# Altium PCB HiFive1.B01.PcbDoc (part 1 of 2)
Units mil, origin at the board's own origin, x right, y up, seen from the top; angles counter-clockwise.
Board outline 2700 x 2100 mil, 2 copper layers (Top Layer, Bottom Layer), stack 61 mil thick; 112 components, 78 nets, 451 pads, 247 vias.
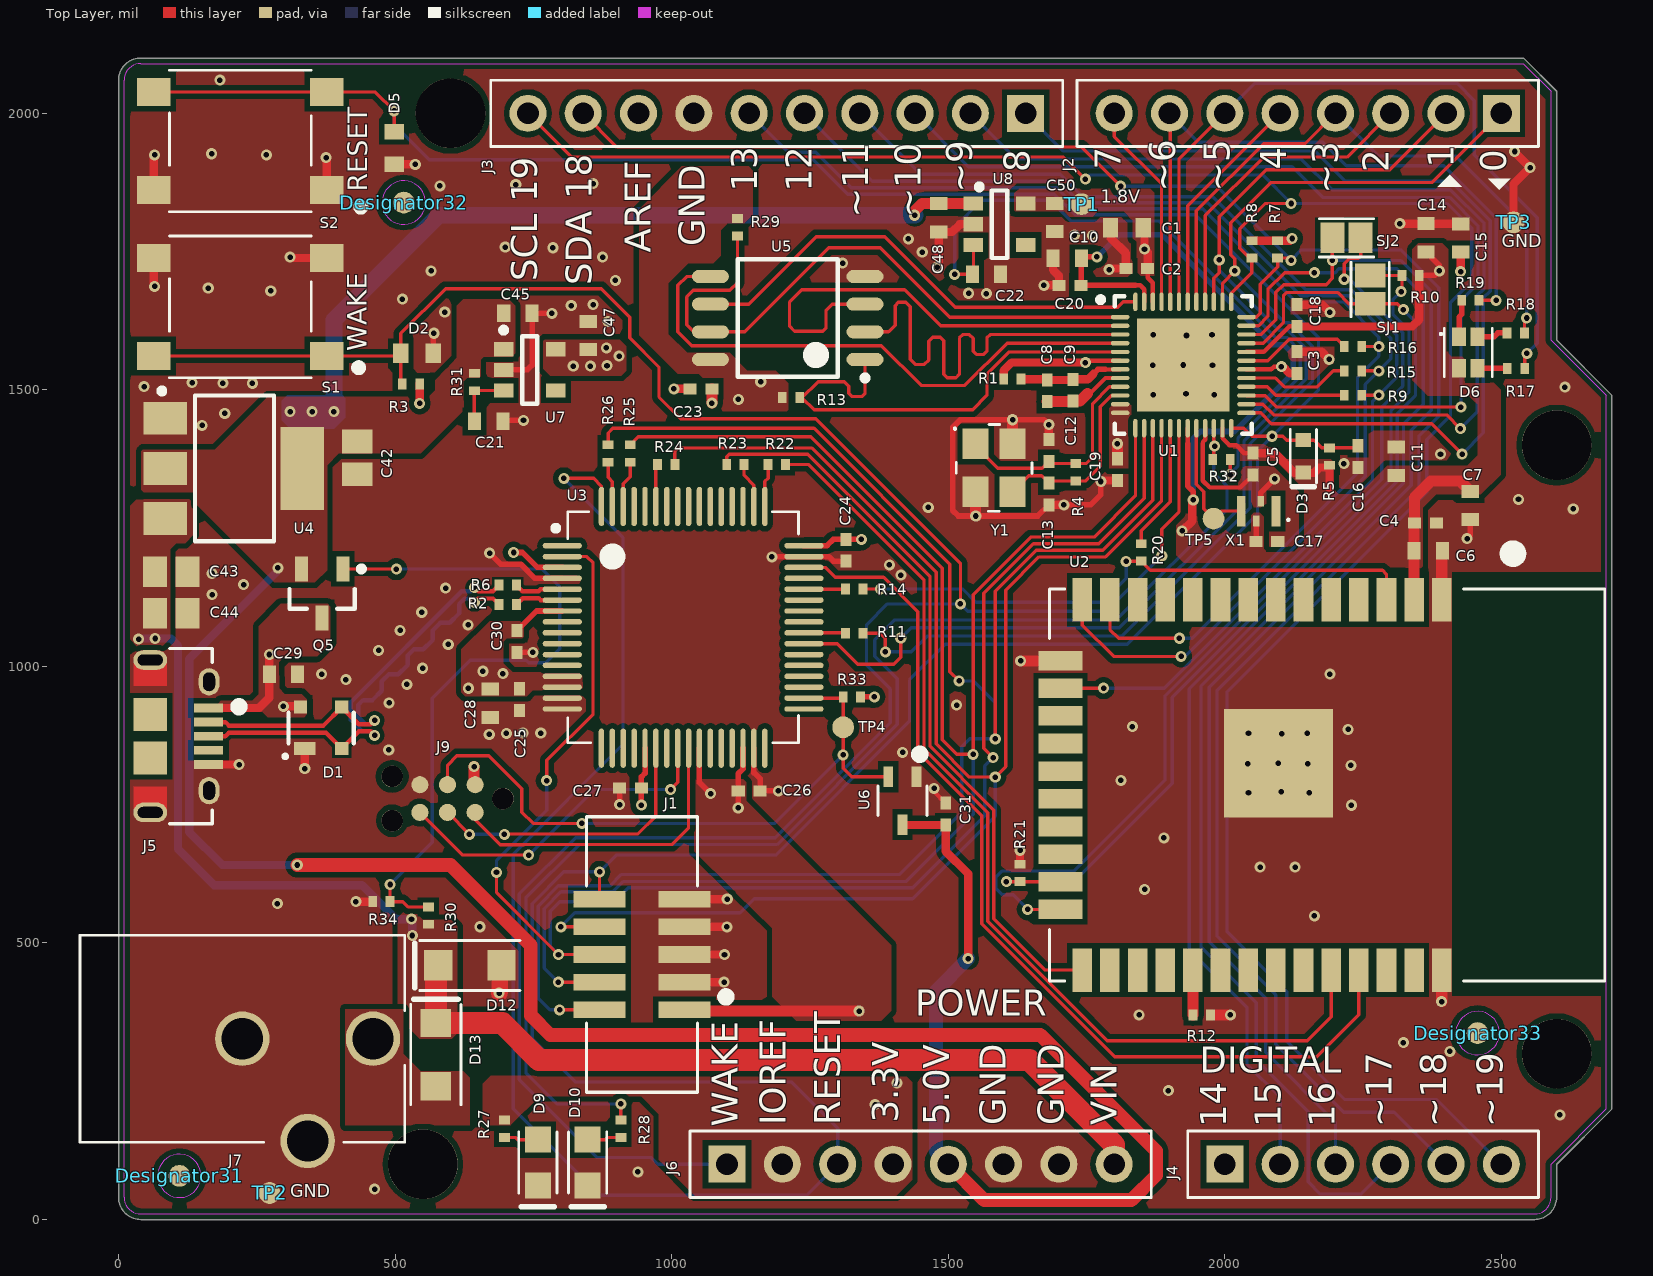
[diagram p0: Top Layer view]
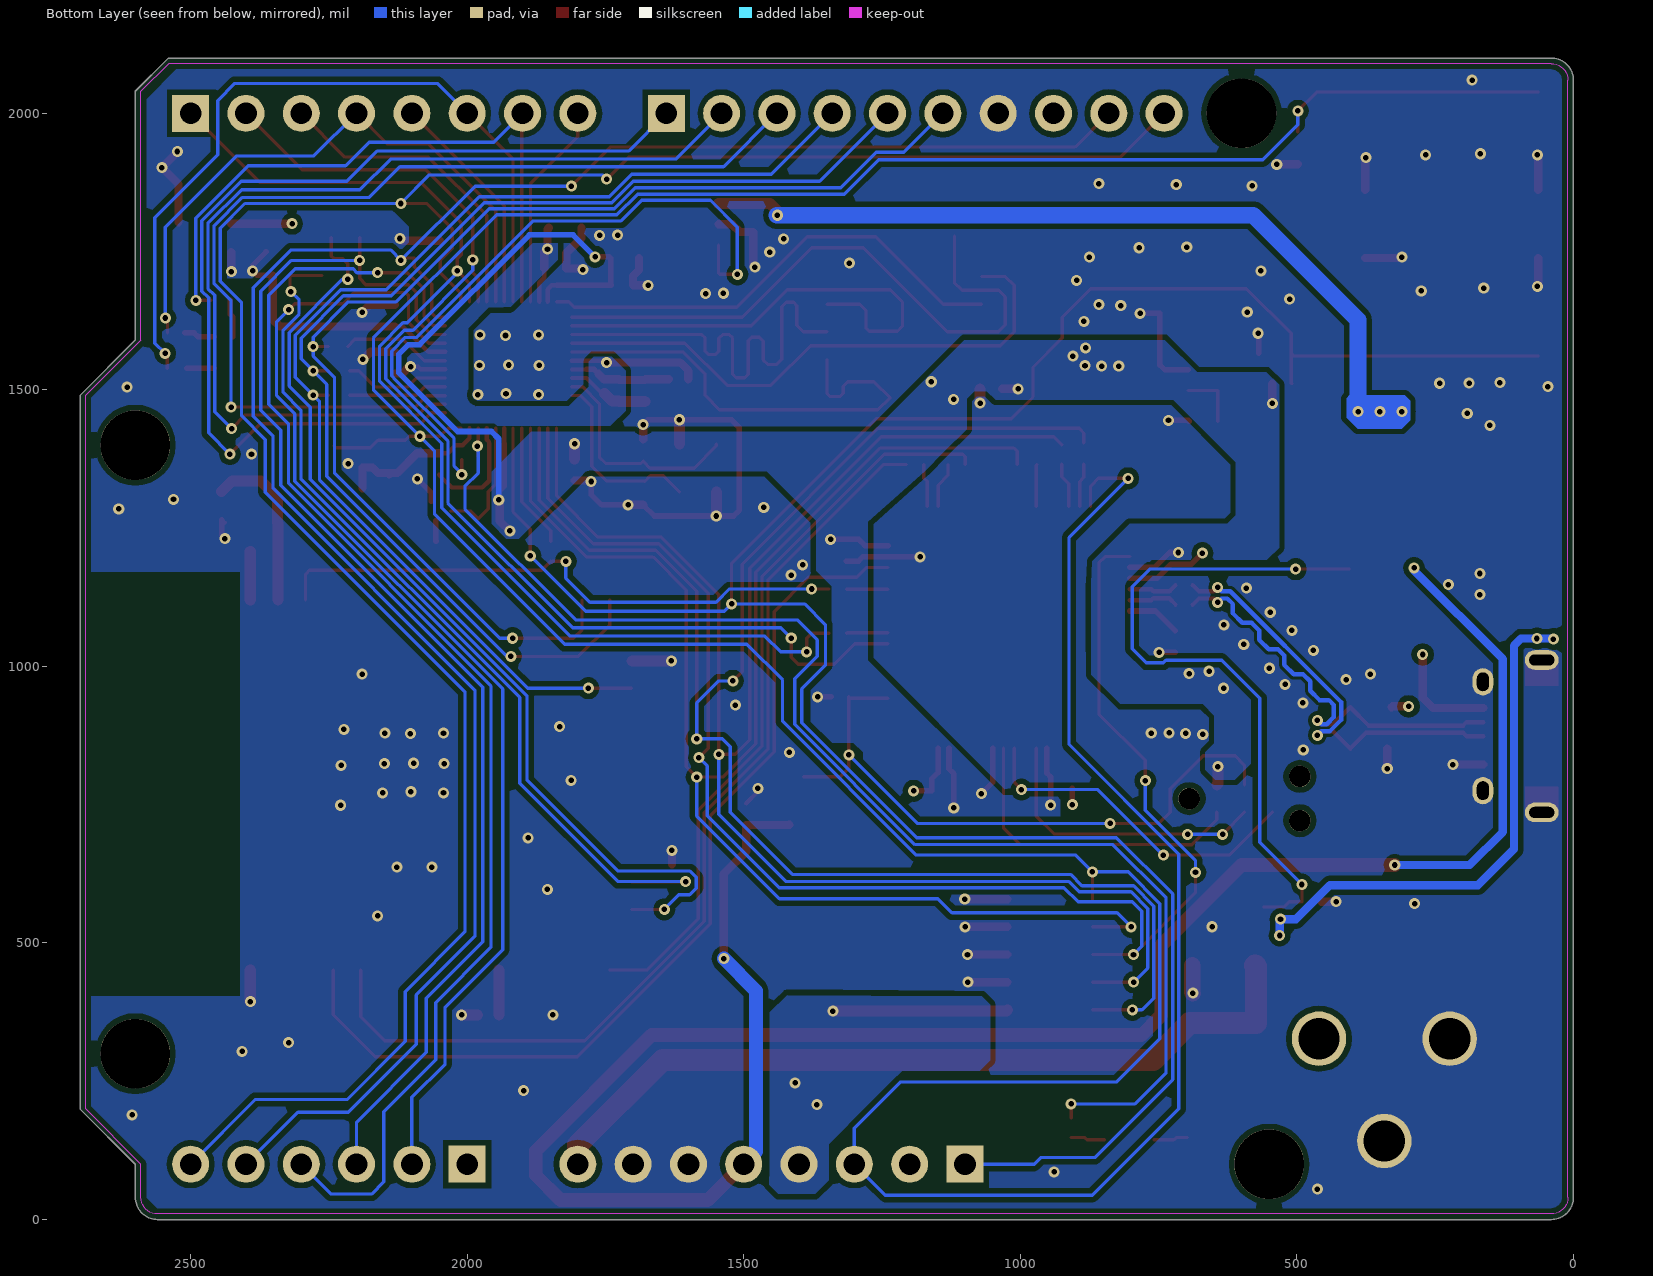
[diagram p1: Bottom Layer view, seen from below]

## Layer stack, top to bottom
Top Solder: solder mask 0.5, Solder Resist, Dk 3.5
Top Layer: signal copper 1.4
Dielectric 1: core 58.2, FR-4, Dk 4
Bottom Layer: signal copper 1.4
Bottom Solder: solder mask 0.5, Solder Resist, Dk 3.5

## Board outline
0,40 0,2060 cw(c40,2060) 40,2100 2540,2100 2600,2040 2600,1590 2700,1490 2700,200 2600,100 2600,40 cw(c2560,40) 2560,0 40,0 cw(c40,40)

## Design rules (kind name [scope] priority, off if disabled: settings)
Clearance 90ohm [InNetClass('DIFF90') vs IsRegion] p1: gap=6 ignorepadtopadclearanceinfootprint=FALSE except(5: Track-Track SMDPad-SMDPad SMDPad-Poly SMDPad-Region Region-Region; 7: Via-Poly; 8: Arc-Hole Track-Hole SMDPad-Hole THPad-Hole Via-Hole Fill-Hole Poly-Hole Region-Hole Text-Hole; 10: Arc-Poly THPad-Poly Fill-Poly; 12: Poly-Poly)
Clearance PolygonClearance [InPolygon] p2: gap=10 ignorepadtopadclearanceinfootprint=FALSE except(8: Arc-Hole Track-Hole SMDPad-Hole THPad-Hole Via-Hole Fill-Hole Poly-Hole Region-Hole Text-Hole)
Clearance [All] p3: gap=6 ignorepadtopadclearanceinfootprint=FALSE except(5: Track-Track SMDPad-SMDPad SMDPad-Poly SMDPad-Region Region-Region; 8: Arc-Hole Track-Hole SMDPad-Hole THPad-Hole Via-Hole Fill-Hole Poly-Hole Region-Hole Text-Hole; 10: Arc-Poly THPad-Poly Via-Poly Fill-Poly; 12: Track-Poly Poly-Poly)
ComponentClearance [All] p1: gap=3 collisioncheckmode=3 verticalgap=3 showdistances=FALSE
DiffPairsRouting DIFF90DiffPairsRouting [InNetClass('DIFF90')] p1: maxlimit=5 minlimit=5 mostfreqgap=5 toplayer_minwidth=8 toplayer_maxwidth=8 toplayer_prefwidth=8 bottomlayer_minwidth=8 bottomlayer_maxwidth=8 bottomlayer_prefwidth=8 maxuncoupledlength=500
HoleSize [All] p1: absolutevalues=TRUE maxlimit=150 minlimit=1 maxpercent=80.000 minpercent=20.000
MatchedLengths QSPIMatchedLengths [InNetClass('QSPI')] p1: tolerance=200 checknetsindiffpair=FALSE checkdiffpairvsdiffpair=TRUE checkxsignals=TRUE checkothers=TRUE
MatchedLengths Diff90MatchedLengths [InxSignalClass('USB')] p2: tolerance=10 checknetsindiffpair=TRUE checkdiffpairvsdiffpair=FALSE checkxsignals=FALSE checkothers=FALSE
MinimumSolderMaskSliver [All] p1: minsoldermaskwidth=0
PlaneClearance [All] p1: clearance=10
PlaneConnect [All] p1: planeconnectstyle=Direct reliefexpansion=20 reliefentries=4 reliefconductorwidth=10 reliefairgap=10
PolygonConnect [All] p1: connectstyle=Direct reliefconductorwidth=10 reliefentries=4 polygonreliefangle="90 Angle" airgapwidth=10
RoutingVias [All] p1: holewidth=10 width=20 viastyle="Through Hole" minholewidth=10 minwidth=20 maxholewidth=28 maxwidth=50
SilkToSilkClearance [All] p1: silktosilkclearance=0
SilkToSolderMaskClearance [IsPad] p1: minsilkscreentomaskgap=0 clearancetoexposedcopper=TRUE
SolderMaskExpansion [All] p1: expansion=4
Width PWR [InNetClass('PWR')] p1: maxlimit=40 minlimit=8 preferedwidth=20 minimp=50.000000 maximp=50.000000 favimp=50.000000
Width AntennaImpedanceMatch [(InNet('ANT_OUT1') OR InNet('ANT_OUT2') OR InNet('LNA_IN'))] p2: maxlimit=6.32 minlimit=5.42 preferedwidth=6.08 impedancedriven=TRUE minimp=49.000000 maximp=53.000000 favimp=50.000000
Width [All] p3: maxlimit=40 minlimit=6 preferedwidth=6
22 further rules are at their usual default settings.

## Classes and differential pairs
component class Freedom_E310: C1 C2 C3 C5 C7 C8 C9 C10 C11 C12 C13 C14 C15 C16 C17 C18 C19 C20 C23 D2 D3 D5 D6 J1 J2 J3 J4 J6 R1 R3 R4 R5 R7 R8 R9 R10 R13 R15 R16 R17 R18 R19 R29 S1 S2 SJ1 SJ2 TP5 U1 U5 X1 Y1
component class Debug: C24 C25 C26 C27 C28 C29 C30 C31 D1 J5 J9 R2 R6 R11 R14 R22 R23 R24 R25 R26 R33 TP4 U3 U6
component class Power: C21 C22 C42 C43 C44 C45 C47 C48 C50 D9 D10 D12 D13 J7 Q5 R27 R28 R30 R31 R32 R34 TP1 TP2 TP3 U4 U7 U8
net class DIFF90: USB_D_N USB_D_P USB_D_R_N USB_D_R_P
component class WiFi_BT: C4 C6 R12 R20 R21 U2
net class QSPI: QSPI_CS0 QSPI_DQ0 QSPI_DQ1 QSPI_DQ2 QSPI_DQ3 QSPI_SCK
differential pair USB_D_R: +USB_D_R_P -USB_D_R_N
differential pair USB_D: +USB_D_P -USB_D_N

## Components (designator, comment, footprint, x,y, rotation, side; value= is the part's Value field where it differs from the comment)
C1 "10uF" C0603#1 1823,1793 r180 top
C2 "0.1uF" C0402#1 1840.83,1719.37 r0 top
C3 "0.1uF" C0402#2 2130.83,1549.37 r270 top
C4 "0.1uF" C0402#1 2362.87,1259.1 r180 top
C5 "0.1uF" C0402#1 2051,1366 r90 top
C6 "10uF" C0603#2 2367.87,1209.1 r0 top
C7 "10uF" C0603#2 2444,1291 r270 top
C8 "0.1uF" C0402#3 1678.99,1498.37 r90 top
C9 "0.1uF" C0402#3 1725.83,1499.37 r90 top
C10 "10uF" C0603#2 1715,1738 r180 top
C11 "10uF" C0603#2 2310,1371 r90 top
C12 "15pF" C0402#1 1681.83,1390.53 r90 top
C13 "15pF" C0402#1 1681.83,1311.79 r270 top
C14 "10uF" C0603#2 2363.8,1775 r90 top
C15 "10uF" C0603#2 2426.52,1774.66 r90 top
C16 "10nF" C0402#1 2240.83,1379.37 r270 top
C17 "0.1uF" C0402#1 2076,1226 r180 top
C18 "0.1uF" C0402#1 2130.83,1634.37 r270 top
C19 "0.1uF" C0402#1 1805.83,1355.86 r90 top
C20 "0.1uF" C0402#1 1720,1689 r0 top
C21 "DNP" C0603#2 669,1443 r0 top value=10uF
C22 "10uF" C0603#2 1569.17,1708.88 r0 top
C23 "0.1uF" C0402#1 1052.76,1501.93 r180 top
C24 "0.1uF" C0402#1 1315,1210 r270 top
C25 "0.1uF" C0402#1 725,940 r270 top locked
C26 "0.1uF" C0402#1 1140,775 r0 top
C27 "0.1uF" C0402#1 925.32,780 r180 top
C28 "10uF" C0603#2 671.82,933.34 r90 top
C29 "10uF" C0603#2 298,986 r180 top
C30 "0.1uF" C0402#1 720,1045 r270 top
C31 "0.1uF" C0402#1 1495.46,733.1 r90 top
C42 "22uF" C0805 431,1377 r270 top
C43 "10uF" C0805 95,1171 r0 top
C44 "10uF" C0805 95,1096 r0 top
C45 "1uF" C0603#2 721.87,1638.21 r0 top
C47 "1uF" C0603#2 848.74,1598.27 r90 top
C48 "1uF" C0603#2 1482.63,1811.13 r270 top
C50 "1uF" C0603#2 1692.47,1811.75 r270 top
D1 "PRTR5V0U2X,215" SOT-143B 366.05,888.93 r0 top
D2 "PESD0603-240" R0603 539.53,1566 r0 top
D3 "Diode" SOD523 2142,1380 r90 top value=1N4148WT-7
D5 "PESD0603-240" R0603 498.06,1937.39 r270 top
D6 "LED_RGB_LTST-C19HE1WT" LED0606 2440.27,1567.54 r270 top value=RGB
D9 "Green" LED0805 758,103 r90 top
D10 "Green" LED0805 848,103 r90 top
D12 "SMF12A" SOD-123FL 635,459.37 r0 top
D13 "DB2W40300L" SOD-123FL 573.58,298.1 r270 top
Designator31 "Comment" FIDUCIAL10-20 110,79 r180 top
Designator32 "Comment" FIDUCIAL10-20 515.62,1838.64 r180 top
Designator33 "Comment" FIDUCIAL10-20 2457,337 r180 top
J1 "JTAG" CNC_3221-10-0300-00 1023.11,379.12 r90 top locked
J2 "Arduino_8P_IO" ARDUINO_8P_IO 2150,2000 r180 top locked
J3 "Arduino_10P" ARDUINO_10P 1190,2000 r180 top locked
J4 "Arduino_6P" ARDUINO_6P 2250,100 r0 top locked
J5 "MicroUSB2.0 Connector" FCI_10118194-0001LF 162.5,925 r270 top locked
J6 "Arduino_8P_POWER" ARDUINO_8P_POWER 1450,100 r0 top locked
J7 "PowerJack3P" PJ-102AH 204,327 r0 top locked
J9 "Header 2x3" TC2030-IDC-FP 594.65,761.11 r180 top
Q5 "MOSFET-P_SOT23" SOT-23B 368,1132 r270 top value=P-Channel
R1 "100R" R0402 1615.83,1519.37 r0 top
R2 "33R" R0402 703.63,1111.89 r0 top
R3 "100K" R0402 528.53,1511 r180 top
R4 "1M" R0402 1730.45,1351.16 r270 top
R5 "100K" R0402 2189.32,1379.37 r270 top
R6 "33R" R0402 703.63,1146.89 r0 top
R7 "DNP" R0402 2095.51,1754.06 r90 top value=2K
R8 "DNP" R0402 2049.01,1754.06 r90 top value=2K
R9 "22R" R0402 2231.83,1490.37 r180 top
R10 "100K" R0402 2336,1706.96 r0 top
R11 "100R" R0402 1330,1060 r0 top
R12 "1K" R0402 1958.34,370.01 r180 top
R13 "100K" R0402 1215.76,1485.93 r180 top
R14 "100R" R0402 1330,1140 r0 top
R15 "22R" R0402 2231.83,1534.37 r180 top
R16 "22R" R0402 2231.83,1578.37 r180 top
R17 "330R" R0402 2526.54,1539 r0 top
R18 "330R" R0402 2526,1603 r0 top
R19 "330R" R0402 2444,1662 r0 top
R20 "1K" R0402 1849,1206.31 r90 top
R21 "DNP" R0402 1629.6,626.85 r270 top value=1K
R22 "100R" R0402 1190,1365 r0 top locked
R23 "100R" R0402 1115,1365 r180 top
R24 "100R" R0402 990,1365 r0 top
R25 "100R" R0402 925,1385 r90 top
R26 "100R" R0402 885,1385 r90 top
R27 "330R" R0402 698,164.02 r270 top
R28 "330R" R0402 908,164.02 r270 top
R29 "100K" R0402 1119,1794 r270 top
R30 "100K" R0402 560,549.37 r270 top
R31 "100K" R0402 643.18,1514.41 r90 top
R32 "150K" R0402 1994,1374 r0 top
R33 "100K" R0402 1325.75,945 r180 top
R34 "100K" R0402 475,574.69 r0 top
S1 "SW-PB 4P" PTS645_SMT 220,1650 r180 top locked
S2 "SW-PB 4P" PTS645_SMT 220,1950 r180 top locked
SJ1 "Solder Jumper" SJ0805 2262.83,1681.37 r90 top
SJ2 "Solder Jumper" SJ0805 2220,1775 r0 top
TP1 "Testpoint" TESTPOINT_SMT 1740.93,1835.72 r270 top
TP2 "Testpoint" TESTPOINT_SMT 273,48 r270 top
TP3 "Testpoint" TESTPOINT_SMT 2522,1803 r270 top
TP4 "Testpoint" TESTPOINT_SMT 1310,890 r90 top
TP5 "Testpoint" TESTPOINT_SMT 1979.74,1267.16 r90 top
U1 "FE310-G002" QFN48_40P600X600X90_HS-49 1925,1545 r0 top locked
U2 "ESP32-SOLO-1" ESP-WROOM-32 2061.17,785.63 r270 top
U3 "MK22FN128VLH10" LQFP-64 1020.63,1070.71 r0 top locked
U4 "NCP1117LPST50T3G" SOT223P700X180-4N 208,1358 r0 top locked
U5 "32Mbit" SOIC127P790X216-8N 1209.76,1630 r180 top locked
U6 "MIC803-30D2VC3" SOT65P210X110-3N_A 1417.21,757.33 r180 top locked
U7 "RT9080-33GJ5" TSOT23-5 743.36,1536.17 r0 top
U8 "RT9080-18GJ5" TSOT23-5 1592.72,1799.4 r0 top locked
X1 "32.768KHz" SiTime2012 2061,1281 r180 top locked
Y1 "16MHz" X3225 1583,1359 r270 top

## Footprints (in the part's own frame and the unit in brackets; to place one, negate y for a bottom-side part, rotate by r counter-clockwise, add the part's x,y. Pads: shape width x height; smd on the part's side, far side on the other; paste and mask are expansions set on the pad)
ARDUINO_6P [mm] "Arduino 6 Pin Header; Pitch 2.54 mm (0.100 in); 1x6"
  rect 1.7x1.7 hole 1: 1(-6.35,0)
  round 1.7 hole 1: 2(-3.81,0) 3(-1.27,0) 4(1.27,0) 5(3.81,0) 6(6.35,0)
  silkscreen extent -8.05,-1.52 8.05,1.52, body extent -8.12,-1.59 8.12,1.59, height 20.6
ARDUINO_8P_IO [mm] "Arduino 8 Pin IO Header; Pitch 2.54 mm (0.100 in); 1x8"
  rect 1.7x1.7 hole 1: 1(-8.89,0)
  round 1.7 hole 1: 2(-6.35,0) 3(-3.81,0) 4(-1.27,0) 5(1.27,0) 6(3.81,0) 7(6.35,0) 8(8.89,0)
  silkscreen extent -10.59,-1.52 10.59,3.5, body extent -10.66,-1.59 10.66,3.5, height 20.6
ARDUINO_8P_POWER [mm] "Arduino 8 Pin Power Header; Pitch 2.54 mm (0.100 in); 1x8"
  rect 1.7x1.7 hole 1: 1(-8.89,0)
  round 1.7 hole 1: 2(-6.35,0) 3(-3.81,0) 4(-1.27,0) 5(1.27,0) 6(3.81,0) 7(6.35,0) 8(8.89,0)
  silkscreen extent -10.59,-1.52 10.59,1.52, body extent -10.66,-1.59 10.66,1.59, height 20.6
ARDUINO_10P [mm] "Arduino 10 Pin Header; Pitch 2.54 mm (0.100 in); 1x10"
  rect 1.7x1.7 hole 1: 1(-11.43,0)
  round 1.7 hole 1: 2(-8.89,0) 3(-6.35,0) 4(-3.81,0) 5(-1.27,0) 6(1.27,0) 7(3.81,0) 8(6.35,0) 9(8.89,0) 10(11.43,0)
  silkscreen extent -13.13,-1.52 13.13,1.52, body extent -13.2,-1.59 13.2,1.59, height 20.6
C0402#1 [mm] "Chip Capacitor, Body 1.0x0.5mm, IPC High Density"
  rect 0.6x0.5 smd: 1(-0.5,0) 2(0.5,0)
  body extent -0.95,-0.4 0.95,0.4, height 1.3
C0402#2 [mm] "Chip Capacitor, Body 1.0x0.5mm, IPC High Density"
  rect 0.6x0.5 smd: 1(-0.5,0)
  rect 0.6x0.5 smd mask+0.038: 2(0.5,0)
  body extent -0.95,-0.4 0.95,0.4, height 1.3
C0402#3 [mm] "Chip Capacitor, Body 1.0x0.5mm, IPC High Density"
  rect 0.6x0.5 smd mask+0.038: 1(-0.5,0)
  rect 0.6x0.5 smd: 2(0.5,0)
  body extent -0.95,-0.4 0.95,0.4, height 1.3
C0603#1 [mm] "Chip Capacitor, Body 1.6x0.8mm, IPC High Density"
  rect 0.7x0.9 smd: 1(-0.75,0) 2(0.75,0)
  body extent -1.25,-0.6 1.25,0.6, height 0.9
C0603#2 [mm] "Chip Capacitor, Body 1.6x0.8mm, IPC High Density"
  rect 0.6x0.8 smd mask+0.05: 1(-0.65,0) 2(0.65,0)
  body extent -1,-0.53 1.06,0.53, height 0.9
C0805 [mm] "Chip Capacitor, Body 2.0x1.3mm, IPC High Density"
  rect 1.1x1.4 smd: 1(-0.75,0) 2(0.75,0)
  body extent -1.45,-0.85 1.45,0.85, height 1.4
CNC_3221-10-0300-00 [mm]
  rect 0.76x2.4 smd mask+0: 1(0,0) 2(0,3.9) 3(1.27,0) 4(1.27,3.9) 5(2.54,0) 6(2.54,3.9) 7(3.81,0) 8(3.81,3.9) 9(5.08,0) 10(5.08,3.9)
  silkscreen extent -3.78,-2.1 8.86,4.5, body extent -5.13,-2.52 10.21,6.42, height 5.6
ESP-WROOM-32 [mm] "Espressif WiFi / BT Module"
  rect 2x0.9 smd: 1(-8.5,8.41) 2(-8.5,7.14) 3(-8.5,5.87) 4(-8.5,4.6) 5(-8.5,3.33) 6(-8.5,2.06) 7(-8.5,0.79) 8(-8.5,-0.48) 9(-8.5,-1.75) 10(-8.5,-3.02) 11(-8.5,-4.29) 12(-8.5,-5.56) 13(-8.5,-6.83) 14(-8.5,-8.1) 25(8.5,-8.1) 26(8.5,-6.83) 27(8.5,-5.56) 28(8.5,-4.29) 29(8.5,-3.02) 30(8.5,-1.75) 31(8.5,-0.48) 32(8.5,0.79) 33(8.5,2.06) 34(8.5,3.33) 35(8.5,4.6) 36(8.5,5.87) 37(8.5,7.14) 38(8.5,8.41)
  rect 0.9x2 smd: 15(-5.715,-9.1) 16(-4.445,-9.1) 17(-3.175,-9.1) 18(-1.905,-9.1) 19(-0.635,-9.1) 20(0.635,-9.1) 21(1.905,-9.1) 22(3.175,-9.1) 23(4.445,-9.1) 24(5.715,-9.1)
  rect 5x5 smd paste-2.5 mask+0: 39(-1,0.91)
  rect 1.75x1.75 on Top Paste: ""(-2.125,2.035) ""(-2.125,-0.215) ""(0.125,2.035) ""(0.125,-0.215)
  silkscreen extent -10.94,-9.6 9,15.9, body extent -11.24,-10.2 9.6,15.96, height 1.27
FCI_10118194-0001LF [mm] "CONN RCPT USB2.0 MICRO B SMD R/A"
  rect 0.4x1.35 smd mask+0: 1(0,0) 2(0.65,0) 3(1.3,0) 4(1.95,0) 5(2.6,0)
  oval 1.25x0.95 hole 0.55 slot 0.85 at 0 deg paste+0 mask+0: SH1(-1.2,0.025) SH2(3.8,0.025)
  oval 0.9x1.55 hole 0.5 slot 1.15 at 90 deg mask+0: SH3(-2.2,-2.675) SH6(4.8,-2.675)
  rect 1.5x1.55 smd mask+0: SH4(0.3,-2.675) SH5(2.3,-2.675)
  Top Layer region: -2.2,-3.45 -1,-3.45 -1,-1.9 -2.2,-1.9
  Top Layer region: 3.6,-3.45 4.8,-3.45 4.8,-1.9 3.6,-1.9
  silkscreen extent -2.73,-1.78 5.33,1.6, body extent -8.22,-9.48 7.32,1.99, height 3
FIDUCIAL10-20 [mm]
  round 1 smd paste-1 mask+0.5: 1(0,0)
  body extent -1,-1 1,1, height 1.27
LED0606 [mm] "LED 4 PIN 0606"
  rect 0.85x0.65 smd mask+0.041: 1(-0.725,-0.425) 2(-0.725,0.425) 3(0.725,0.425) 4(0.725,-0.425)
  silkscreen extent -1.1,-1.3 1.1,1.1, body extent -1.19,-1.35 1.19,1.16, height 0.35
LED0805 [mm] "Chip LED, Body 2.0x1.2mm, IPC High Density"
  rect 1.2x1.2 smd: 1(-1.05,0) 2(1.05,0)
  silkscreen extent -2.03,-0.88 1.4,0.88, body extent -2.16,-0.94 1.75,0.94, height 0.9
LQFP-64 [mm] "Thin QFP, 64-Leads, Body 10x10mm, Pitch 0.5mm, IPC Medium Density"
  oval 1.8x0.25 smd mask+0.07: 1(-5.55,3.75) 2(-5.55,3.25) 3(-5.55,2.75) 4(-5.55,2.25) 5(-5.55,1.75) 6(-5.55,1.25) 7(-5.55,0.75) 8(-5.55,0.25) 9(-5.55,-0.25) 10(-5.55,-0.75) 11(-5.55,-1.25) 12(-5.55,-1.75) 13(-5.55,-2.25) 14(-5.55,-2.75) 15(-5.55,-3.25) 16(-5.55,-3.75) 33(5.55,-3.75) 34(5.55,-3.25) 35(5.55,-2.75) 36(5.55,-2.25) 37(5.55,-1.75) 38(5.55,-1.25) 39(5.55,-0.75) 40(5.55,-0.25) 41(5.55,0.25) 42(5.55,0.75) 43(5.55,1.25) 44(5.55,1.75) 45(5.55,2.25) 46(5.55,2.75) 47(5.55,3.25) 48(5.55,3.75)
  oval 0.25x1.8 smd mask+0.07: 17(-3.75,-5.55) 18(-3.25,-5.55) 19(-2.75,-5.55) 20(-2.25,-5.55) 21(-1.75,-5.55) 22(-1.25,-5.55) 23(-0.75,-5.55) 24(-0.25,-5.55) 25(0.25,-5.55) 26(0.75,-5.55) 27(1.25,-5.55) 28(1.75,-5.55) 29(2.25,-5.55) 30(2.75,-5.55) 31(3.25,-5.55) 32(3.75,-5.55) 49(3.75,5.55) 50(3.25,5.55) 51(2.75,5.55) 52(2.25,5.55) 53(1.75,5.55) 54(1.25,5.55) 55(0.75,5.55) 56(0.25,5.55) 57(-0.25,5.55) 58(-0.75,5.55) 59(-1.25,5.55) 60(-1.75,5.55) 61(-2.25,5.55) 62(-2.75,5.55) 63(-3.25,5.55) 64(-3.75,5.55)
  silkscreen extent -5.97,-5.3 5.3,5.3, body extent -6.72,-6.72 6.73,6.73, height 1.6
PJ-102AH [mm] "PJ-102AH DC Jack"
  round 2.5 hole 1.9: 1(6.5,0) 2(0.5,0) 3(3.5,-4.7)
  silkscreen extent -6.95,-4.75 7.95,4.75, body extent -7.25,-6.05 8.02,4.82, height 11
PTS645_SMT [mm] "Pushbutton SPST SMT"
  rect 1.55x1.3 smd: 1(-3.975,2.25) 2(3.975,2.25) 3(-3.975,-2.25) 4(3.975,-2.25)
  silkscreen extent -3.25,-3.25 3.25,3.25, body extent -4.9,-3.32 4.9,3.32, height 4.4
QFN48_40P600X600X90_HS-49 [mm] "QFN, 48-Leads, Body 6.00x6.00mm, Pitch 0.40mm, Thermal Pad 4.25x4.25mm, IPC Medium Density"
  oval 0.85x0.2 smd paste+0 mask+0.05: 1(-2.9,2.2)
  oval 0.85x0.2 smd mask+0.05: 2(-2.9,1.8) 3(-2.9,1.4) 4(-2.9,1) 5(-2.9,0.6) 6(-2.9,0.2) 7(-2.9,-0.2) 8(-2.9,-0.6) 9(-2.9,-1) 10(-2.9,-1.4) 11(-2.9,-1.8) 12(-2.9,-2.2) 25(2.9,-2.2) 26(2.9,-1.8) 27(2.9,-1.4) 28(2.9,-1) 29(2.9,-0.6) 30(2.9,-0.2) 31(2.9,0.2) 32(2.9,0.6) 33(2.9,1) 34(2.9,1.4) 35(2.9,1.8) 36(2.9,2.2)
  oval 0.2x0.85 smd mask+0.05: 13(-2.2,-2.9) 14(-1.8,-2.9) 15(-1.4,-2.9) 16(-1,-2.9) 17(-0.6,-2.9) 18(-0.2,-2.9) 19(0.2,-2.9) 20(0.6,-2.9) 21(1,-2.9) 22(1.4,-2.9) 23(1.8,-2.9) 24(2.2,-2.9) 37(2.2,2.9) 38(1.8,2.9) 39(1.4,2.9) 40(1,2.9) 41(0.6,2.9) 42(0.2,2.9) 43(-0.2,2.9) 44(-0.6,2.9) 45(-1,2.9) 46(-1.4,2.9) 47(-1.8,2.9) 48(-2.2,2.9)
  rect 4.25x4.25 smd paste-2.125 mask+0.05: 49(0,0)
  rect 1.375x1.375 on Top Paste mask+0: ""(-0.937,-0.937) ""(-0.937,0.937) ""(0.937,-0.937) ""(0.937,0.937)
  silkscreen extent -3.92,-3.15 3.15,3.15, body extent -4.05,-3.6 3.6,3.6, height 0.9
R0402 [mm] "Chip Resistor, Body 1.0x0.5mm, IPC High Density"
  rect 0.4x0.5 smd mask+0.05: 1(-0.4,0) 2(0.4,0)
  body extent -0.65,-0.35 0.65,0.35, height 1.3
R0603 [mm] "Chip Resistor, Body 1.6x0.8mm, IPC High Density"
  rect 0.7x0.9 smd: 1(-0.75,0) 2(0.75,0)
  body extent -1.25,-0.6 1.25,0.6, height 0.9
SiTime2012 [mm] "SiTime 2.0mmx1.2mm Oscillator Package"
  rect 0.4x1.4 smd: 1(-0.8,0) 3(0.8,0)
  rect 0.3x0.5 smd: 2(-0.1,-0.45) 4(0.1,0.45)
  silkscreen extent -1.42,0.36 -1.32,0.46, body extent -1.47,-0.9 1.3,0.9, height 0.6
SJ0805 [mm] "Solder Bridge, Body 2.0x1.3mm, IPC High Density"
  rect 1.1x1.4 smd mask+0.102: 1(-0.65,0)
  rect 1.1x1.4 smd paste+0: 2(0.65,0)
  silkscreen extent -1.25,-0.88 1.25,0.88, body extent -1.31,-0.94 1.32,0.94, height 1.27
SOD523 [mm] "SOD523, 2-Leads, Body 0.80x1.60mm, IPC Medium Density"
  rect 0.65x0.7 smd: 1(-0.75,0) 2(0.75,0)
  silkscreen extent -1.4,-0.6 1.22,0.6, body extent -1.52,-0.66 1.29,0.66, height 0.65
SOD-123FL [mm]
  rect 1.3x1.4 smd: 1(-1.45,0) 2(1.45,0)
  silkscreen extent -2.54,-1.15 2.3,1.15, body extent -2.67,-1.21 2.36,1.21, height 1.1
SOIC127P790X216-8N [mm] "SOIC, 8-Leads, Body 5.28x5.28mm, Pitch 1.27mm, IPC Medium Density"
  oval 1.7x0.6 smd: 1(-3.55,1.905) 2(-3.55,0.635) 3(-3.55,-0.635) 4(-3.55,-1.905) 5(3.55,-1.905) 6(3.55,-0.635) 7(3.55,0.635) 8(3.55,1.905)
  silkscreen extent -3.68,-2.7 2.3,2.88, body extent -4.67,-2.97 4.67,3.01, height 2.16
SOT65P210X110-3N_A [mm]
  rect 0.45x0.95 smd mask+0: 1(-0.65,-1.1) 2(0.65,-1.1) 3(0,1.1)
  silkscreen extent -1.12,-2.33 1.12,0.67, body extent -1.45,-2.84 1.45,1.87, height 1.1
SOT223P700X180-4N [mm] "SOT223, 4-Leads, Body 6.50x7.00mm (avg), Pitch 2.30mm, IPC Medium Density"
  rect 2x1.5 smd mask+0.05: 1(-3.15,2.3) 2(-3.15,0) 3(-3.15,-2.3)
  rect 2x3.8 smd mask+0.05: 4(3.15,0)
  silkscreen extent -3.43,-3.35 1.85,3.68, body extent -4.27,-3.62 4.28,3.81, height 1.8
SOT-23B [mm] "SOT23, 3-Leads, Body 2.9x1.3mm, Pitch 0.95mm, Lead Span 2.4mm, IPC Medium Density"
  rect 1.15x0.6 smd: 1(-1.125,0.95) 2(-1.125,-0.95) 3(1.125,0)
  silkscreen extent -1.25,-1.5 0.7,1.93, body extent -2,-1.8 2,2.05, height 1.2
SOT-143B [mm]
  rect 1x0.6 smd: 1(-0.75,-0.95)
  rect 0.6x0.6 smd: 2(0.95,-0.95) 3(0.95,0.95) 4(-0.95,0.95)
  silkscreen extent -1.72,-1.38 1.5,0.7, body extent -1.82,-1.48 1.6,1.35, height 1.27
TC2030-IDC-FP [mil] "Tag Connect 6 Pin Connector"
  round 31 smd paste-30 mask+1.18: 1(-50,-25) 2(-50,25) 3(0,-25) 4(0,25) 5(50,-25) 6(50,25)
  round 39 hole 39 unplated paste+0 mask+0: SH1(-100,0) SH2(100,40) SH3(100,-40)
  body extent -123,-62 124,63, height 50
TESTPOINT_SMT [mm]
  round 1 smd paste-1 mask+0: 1(0,0)
  body extent -0.5,-0.5 0.5,0.5, height 1.27
TSOT23-5 [mm] "SOT23, 6-Leads, Thin Body 2.9x1.6mm, Pitch 0.95mm, Lead Span 2.7mm, IPC High Density"
  rect 0.9x0.65 smd: 1(-1.2,0.95) 2(-1.2,0) 3(-1.2,-0.95) 4(1.2,-0.95) 5(1.2,0.95)
  silkscreen extent -1.32,-1.55 0.35,1.95, body extent -1.8,-1.7 1.8,2.08, height 1.1
X3225 [mm] "Crystal 3.2mmx2.5mm"
  rect 1.4x1.2 smd mask+0.07: 1(-1.1,-0.85) 2(1.1,-0.85) 3(1.1,0.85) 4(-1.1,0.85)
  silkscreen extent -2,-1.85 2,1.74, body extent -2.06,-1.9 2.06,1.81, height 0.8

## Part data
C1 C6 C7 C10 C11 C14 C15 C22 C28 C29: library part C0100033, "CAP CER 10UF 10V X5R 0603", Manufacturer="Murata Electronics", Manufacturer PN=GRM188R61A106KE69J, Operating Temperature="-55°C ~ 85°C", Tolerance=±10%, Voltage Rating=10V, Part Number=C0100033, Type=X5R
C2 C3 C4 C5 C8 C9 C17 C18 C19 C20 C23 C24 C25 C26 C27 C30 C31: library part C0100004, "0.10µF 16V Ceramic Capacitor X7R 0402", Manufacturer="Samsung Electro-Mechanics", Manufacturer PN=CL05B104KO5NFNC, Operating Temperature="-55°C ~ 125°C", Tolerance=±10%, Voltage Rating=16V, Part Number=C0100004, Type=X7R
C12 C13: library part C0100038, "CAP CER 15PF 50V C0G/NPO 0402", Manufacturer=Yageo, Manufacturer PN=CC0402JRNPO9BN150, Operating Temperature="-55°C ~ 125°C", Tolerance=±5%, Voltage Rating=50V, Part Number=C0100038, Type=C0G
C16: library part C0100037, "CAP CER 10000PF 50V X7R 0402", Manufacturer="Samsung Electro-Mechanics", Manufacturer PN=CL05B103KB5VPNC, Operating Temperature="-55°C ~ 125°C", Tolerance=±10%, Voltage Rating=50V, Part Number=C0100037, Type=X7R
C21: library part C0100007, "10µF 6.3V Ceramic Capacitor X5R 0603", Manufacturer="Murata Electronics", Manufacturer PN=GRM188R60J106ME47J, Operating Temperature="-55°C ~ 85°C", Tolerance=±10%, Voltage Rating=6.3V, Part Number=C0100007, Type=X5R
C42: library part C0100010, "22µF 6.3V Ceramic Capacitor X5R 0805", Manufacturer="Murata Electronics", Manufacturer PN=GRM21BR60J226ME39L, Operating Temperature="-55°C ~ 85°C", Tolerance=±20%, Voltage Rating=6.3V, Part Number=C0100010, Type=X5R
C43 C44: library part C0100015, "10µF ±10% 25V Ceramic Capacitor X5R 0805", Manufacturer="Murata Electronics", Manufacturer PN=GRM21BR61E106KA73L, Operating Temperature="-55°C ~85°C", Tolerance=±10%, Voltage Rating=25V, Part Number=C0100015, Type=X5R
C45 C47 C48 C50: library part C0100006, "1µF 16V Ceramic Capacitor X5R 0603", Manufacturer="Murata Electronics", Manufacturer PN=GRM188R61C105KA93D, Operating Temperature="-55°C ~ 85°C", Tolerance=±10%, Voltage Rating=16V, Part Number=C0100006, Type=X5R
D1: library part D0000012, "TVS DIODE 5.5V SOT143B", Manufacturer=Nexperia, Temperature Range="-40°C ~ 85°C", Voltage Breakdown=6V, Voltage Reverse Standoff=5.5V, Manufacturer PN=PRTR5V0U2X,215, Part Number=D0000012
D2 D5: library part D0000013, "TVS Diode 24VWM  45VClamp", Manufacturer=Littlefuse, Temperature Range="-55°C ~ 125°C", Voltage Reverse Standoff=24V, Manufacturer PN=PESD0603-240, Part Number=D0000013
D3: library part D0000001, "Diode Standard 80V 125mA Surface Mount SOD-523", Manufacturer="Diodes Incorporated", Manufacturer PN=1N4148WT-7, Temperature Range="-65°C ~ 150°C", Part Number=D0000001
D6: library part E0000005, "Red, Green, Blue (RGB) 624nm Red, 525nm Green, 470nm Blue LED Indication - Discrete 1.8V Red, 2.8V Green, 2.8V Blue 0606", Manufacturer="Lite-on Inc.", Manufacturer PN=LTST-C19HE1WT, Temperature Range="-20°C ~ 80°C", Voltage Forward="1.8V Red, 2.8V Green, 2.8V Blue", Part Number=E0000005
D9 D10: library part E0000001, "Green 570nm LED Indication - Discrete 2.2V 0805", Manufacturer="OSRAM Opto Semiconductors Inc", Manufacturer PN="LG R971-KN-1", Temperature Range="-65°C ~ 150°C", Voltage Forward=2.2V, Part Number=E0000001
D12: library part D0000002, "TVS DIODE 12VWM 19.9VC SOD123", Manufacturer="Littelfuse Inc", Temperature Range="-55°C ~ 150°C", Voltage Breakdown=13.3V, Voltage Reverse Clamping=19.9V, Voltage Reverse Standoff=12V, Manufacturer PN=SMF12A, Part Number=D0000002
D13: library part D0000006, "Diode Schottky 40V 3A (DC) Surface Mount", Manufacturer="Panasonic Electronic Components", Temperature Range="-65°C ~ 150°C", Voltage Forward=0.54V@3A, Manufacturer PN=DB2W40300L, Part Number=D0000006
J1: library part J0000049, "Connector Header Surface Mount 10 position 0.050\" (1.27mm)", Manufacturer="CNC Tech", Manufacturer PN=3221-10-0300-00, Part Number=J0000049
J2: library part J0000005, "Arduino 8 Pin I/O Connector", Manufacturer="Sullins Connector Solutions", Manufacturer PN=PPTC081LFBN-RC, Part Number=J0000005
J3: library part J0000007, "Arduino 10 Pin Connector", Manufacturer="Sullins Connector Solutions", Manufacturer PN=PPTC101LFBN-RC, Part Number=J0000007
J4: library part J0000004, "Arduino 6 Pin Connector", Manufacturer="Sullins Connector Solutions", Manufacturer PN=PPTC061LFBN-RC, Part Number=J0000004
J5: library part J0000048, "USB - micro B USB 2.0 Receptacle Connector 5 Position Surface Mount, Right Angle, Horizontal", Manufacturer="Amphenol FCI", Manufacturer PN=10118194-0001LF, Part Number=J0000048
J6: library part J0000006, "Arduino 8 Pin Power Connector", Manufacturer="Sullins Connector Solutions", Manufacturer PN=PPTC081LFBN-RC, Part Number=J0000006
J7: library part J0000003, "Power Barrel Connector Jack 2.00mm ID (0.079\"), 5.50mm OD (0.217\") Through Hole, Right Angle", Manufacturer="CUI Inc", Manufacturer PN=PJ-102AH, Part Number=J0000003
J9: library part J0000045, "2x3 Connector, Small footprint, no legs, no component", Manufacturer="Tag Connect", Manufacturer PN=TC2030-IDC-FP, Part Number=J0000045
Q5: library part Q0000005, "MOSFET P-CH 20V 4.2A SOT23", Manufacturer="Diodes Inc", Manufacturer PN=DMG2305UX-13, Temperature Range="-55°C ~ 150°C", Part Number=Q0000005
R1 R11 R14 R22 R23 R24 R25 R26: library part R0000020, "RES SMD 100 OHM 1% 1/16W 0402", Manufacturer=Yageo, Manufacturer PN=RC0402FR-07100RL, Power Rating=0.063W, Temperature Range="-55°C ~ 155°C", Tolerance=±1%, Part Number=R0000020, Type="Thick Film"
R2 R6: library part R0000044, "RES SMD 33 OHM 1% 1/16W 0402", Manufacturer=Yageo, Manufacturer PN=RC0402FR-0733RL, Power Rating=0.063W, Temperature Range="-55°C ~ 155°C", Tolerance=±1%, Part Number=R0000044, Type="Thick Film"
R3 R5 R10 R13 R29 R30 R31 R33 R34: library part R0000012, "RES SMD 100K OHM 1% 1/16W 0402", Manufacturer=Yageo, Manufacturer PN=RC0402FR-07100KL, Power Rating=0.063W, Temperature Range="-55°C ~ 155°C", Tolerance=±1%, Part Number=R0000012, Type="Thick Film"
R4: library part R0000021, "RES SMD 1M OHM 1% 1/16W 0402", Manufacturer=Yageo, Manufacturer PN=RC0402FR-071ML, Power Rating=0.063W, Temperature Range="-55°C ~ 155°C", Tolerance=±1%, Part Number=R0000021, Type="Thick Film"
R7 R8: library part R0000025, "RES SMD 2K OHM 1% 1/16W 0402", Manufacturer=Yageo, Manufacturer PN=RC0402FR-072KL, Power Rating=0.063W, Temperature Range="-55°C ~ 155°C", Tolerance=±1%, Part Number=R0000025, Type="Thick Film"
R9 R15 R16: library part R0000022, "RES SMD 22 OHM 1% 1/16W 0402", Manufacturer=Yageo, Manufacturer PN=RC0402FR-0722RL, Power Rating=0.063W, Temperature Range="-55°C ~ 155°C", Tolerance=±1%, Part Number=R0000022, Type="Thick Film"
R12 R20 R21: library part R0000019, "RES SMD 1K OHM 1% 1/16W 0402", Manufacturer=Yageo, Manufacturer PN=RC0402FR-071KL, Power Rating=0.063W, Temperature Range="-55°C ~ 155°C", Tolerance=±1%, Part Number=R0000019, Type="Thick Film"
R17 R18 R19 R27 R28: library part R0000026, "RES SMD 330 OHM 1% 1/16W 0402", Manufacturer=Yageo, Manufacturer PN=RC0402FR-07330RL, Power Rating=0.063W, Temperature Range="-55°C ~ 155°C", Tolerance=±1%, Part Number=R0000026, Type="Thick Film"
R32: library part R0000055, "RES SMD 150K OHM 1% 1/16W 0402", Manufacturer=Yageo, Manufacturer PN=RC0402FR-07150KL, Power Rating=0.063W, Temperature Range="-55°C ~ 155°C", Tolerance=±1%, Part Number=R0000055, Type="Thick Film"
S1: library part M0000004, "Blue Tactile Switch SPST-NO Top Actuated Surface Mount", Manufacturer="C & K Components", Manufacturer PN="PTS645SM43SMTR92 LFS", Part Number=M0000004
S2: library part M0000003, "Red Tactile Switch SPST-NO Top Actuated Surface Mount", Manufacturer="C & K Components", Manufacturer PN="PTS645SK43SMTR92 LFS", Part Number=M0000003
SJ1 SJ2: library part M0000009, "Solder Bridge 0805", Manufacturer=None, Manufacturer PN=None, Part Number=M0000009
TP1 TP2 TP3 TP4 TP5: library part M0000002, "Test Point SMT", Part Number=M0000002
U1: library part U0000050, "SiFive Freedom E310 Microcontroller", Manufacturer=SiFive, Temperature Range="-40°C ~ 85°C", Manufacturer PN=FE310-G002, Part Number=U0000050
U2: library part U0000061, "WiFi 802.11n + BT4.2 Chipset Module Single Core with PCB Antenna 18mmx25.5mm", Manufacturer="Espressif Systems", Temperature Range="-40°C ~ 85°C", Manufacturer PN=ESP32-SOLO-1, Part Number=U0000061
U3: library part U0000058, "ARM® Cortex®-M4 Kinetis K20 Microcontroller IC 32-Bit 100MHz 128KB (128K x 8) FLASH 64-LQFP (10x10)", Manufacturer="NXP USA Inc", Temperature Range="-40°C ~ 105°C", Manufacturer PN=MK22FN128VLH10, Part Number=U0000058
U4: library part U0000051, "IC REG LINEAR 5V 1A SOT223", Manufacturer="ON Semiconductor", Temperature Range="-0°C ~ 125°C", Manufacturer PN=NCP1117LPST50T3G, Part Number=U0000051
U5: library part U0000019, "IC FLASH 32MBIT 133MHZ 8SOIC 2.3 V ~ 3.6 V", Manufacturer=ISSI, Manufacturer PN=IS25LP032D-JBLE, Temperature Range="-40°C ~ 105°C", Part Number=U0000019
U6: library part U0000076, "IC MPU SUPERVISOR SC70-3", Manufacturer=Microchip, Temperature Range="-40°C ~ 125°C", Manufacturer PN=MIC803-30D2VC3, Part Number=U0000076
U7: library part U0000066, "Linear Voltage Regulator IC Positive Fixed 1 Output 3.3V 600mA TSOT-23-5", Manufacturer="Richtek USA", Temperature Range="-40°C ~ 85°C", Manufacturer PN=RT9080-33GJ5, Part Number=U0000066
U8: library part U0000065, "Linear Voltage Regulator IC Positive Fixed 1 Output 1.8V 600mA TSOT-23-5", Manufacturer="Richtek USA", Temperature Range="-40°C ~ 85°C", Manufacturer PN=RT9080-18GJ5, Part Number=U0000065
X1: library part X0000014, "32.768kHz LVCMOS MEMS (Silicon) Oscillator Surface Mount 1.2 V ~ 3.63 V 1.3µA", Frequency Stability="±100 ppm", Manufacturer=SiTime, Manufacturer PN=SIT1533AI-H4-DCC-32.768E, Temperature Range="-40°C ~ 85°C", Part Number=X0000014
Y1: library part X0000015, "16MHz ±10ppm Crystal 9pF 60 Ohm", Frequency Stability=±18ppm, Frequency Tolerance=±10ppm, Load Capacitance=9pF, Manufacturer=Epson, Manufacturer PN="TSX-3225 16.0000MF18X-AC0", Temperature Range="-40°C ~ 85°C", ESR="60 Ohms", Part Number=X0000015

## Free pads (board coordinates)
  round 125.98 hole 125.98 unplated paste-0.98 mask+2.76: Mech1(550,100)
  round 125.98 hole 125.98 unplated paste+0 mask+0: Mech2(600,2000) Mech3(2600,1400) Mech4(2600,300)

## Via types
v1: diameter 20, hole 10, Top Layer to Bottom Layer, tented both sides, 229 vias
v2: diameter 20, hole 10.1, Top Layer to Bottom Layer, tented both sides, 18 vias

## Nets (pads, with @x,y where several pads share a name; then routed paths per layer and width w, separated by ;. In a path a pad name is that pad's centre, name@x,y a point inside that pad or via, vN(x,y) a via of type N, cw(c..) or ccw(c..) an arc to the next point about the centre after c; other vN are vias at no path point)
DBG_RST: J9.3 R33.2 TP4.1 U3.34 U6.2 | length 1173.4
  Top Layer w6: J9.3@594.65,786.11 594.65,821.55 611.58,838.48 669.29,838.48 729,778.76 729,736.6 749.48,716.12 v1(837.4,716.12) ; U3.34@1239.13,942.76 1307.76,942.76 R33.2@1310,945 TP4.1@1310,890 v1(1310,840) 1310,815.81 1325.18,800.63 U6.2@1391.62,800.63
  Bottom Layer w6: v1(837.4,716.12) 1186.12,716.12 v1(1310,840)
DBG_SWDCLK: J9.4 U3.22 | length 529.5
  Top Layer w6: J9.4@594.65,736.11 v1(634.26,696.5) ; v1(697.5,696.5) 698.12,697.12 939.04,697.12 971.42,729.5 U3.22@971.42,852.2
  Bottom Layer w6: v1(634.26,696.5) v1(697.5,696.5)
DBG_SWDIO: J9.2 U3.25 | length 574.7
  Top Layer w6: J9.2@644.65,736.11 644.65,722.48 689.63,677.5 733.07,677.5 733.49,677.92 1000.07,677.92 1030.47,708.32 U3.25@1030.47,852.2
DBG_SWO: J9.6 U3.24 | length 614.4
  Top Layer w6: J9.6@544.65,736.11 621.85,658.92 v1(741.36,658.92) ; v1(997.84,777.34) 1010.79,790.29 U3.24@1010.79,852.2
  Bottom Layer w6: v1(741.36,658.92) 859.78,777.34 v1(997.84,777.34)
DBG_TGT_TCK: R25.1 U3.62 | length 81.3
  Top Layer w6: U3.62@912.36,1289.21 912.36,1330.36 925,1343 R25.1@925,1365.32
DBG_TGT_TDI: R24.1 U3.59 | length 76.2
  Top Layer w6: R24.1@970.32,1365 971.42,1363.9 U3.59@971.42,1289.21
DBG_TGT_TMS: R26.1 U3.63 | length 79.3
  Top Layer w6: R26.1@885,1365.32 885,1342 892.68,1334.32 U3.63@892.68,1289.21
DBG_UART1_DTR: R23.1 U3.50 | length 83.2
  Top Layer w6: R23.1@1130.75,1365 1130.75,1345.73 1148.58,1327.9 U3.50@1148.58,1289.21
DBG_UART1_RTS: R14.1 U3.44 | length 75.3
  Top Layer w6: U3.44@1239.13,1139.61 1313.86,1139.61 R14.1@1314.25,1140
DBG_UART1_TX: R22.1 U3.49 | length 78.3
  Top Layer w6: U3.49@1168.27,1289.21 1168.27,1334.45 1174.25,1340.43 R22.1@1174.25,1365
DBG_UART_TX: R11.1 U3.40 | length 75.5
  Top Layer w6: U3.40@1239.13,1060.87 1313.39,1060.87 R11.1@1314.25,1060
DCIN_DET: Q5.1 R30.1 R34.2 | length 1263.6
  Top Layer w6: Q5.1@405.4,1176.29 405.69,1176 v1(502,1176) ; R34.2@490.75,574.69 v1(490.75,605.75) v1@494.69,609.69 ; R34.2@494.69,574.69 513.57,574.69 523.14,565.12 R30.1@560,565.12
  Bottom Layer w6: v1(490.75,605.75) 567.01,682.01 567.01,942.43 635.65,1011.07 736.58,1011.07 741.08,1006.57 772.26,1006.57 797.72,1032.03 797.72,1144.41 766.14,1176 v1(502,1176)
GND: C1.2 C2.1 C3.1 C4.1 C5.1 C6.2 C7.2 C10.2 C11.2 C12.2 C13.2 C14.2 C15.2 C16.2 C17.1 C18.1 C19.1 C20.1 C21.2 C22.2 C23.1 C24.2 C25.2 C26.2 C27.2 C28.1 C29.1 C30.2 C31.2 C42.2 C43.2 C44.2 C45.2 C47.2 C48.2 C50.2 D1.1 D2.2 D5.2 D9.1 D10.1 D12.2 J1.3 J1.5 J1.7 J1.9 J3.7 J5.5 J5.SH1 J5.SH2 J5.SH3 J5.SH6 J6.6 J6.7 J7.2 J7.3 J9.5 R12.1 R21.1 R34.1 S1.3 S1.4 S2.1 S2.2 TP2.1 TP3.1 U1.21 U1.49 U2.1 U2.15 U2.38 U2.39 U3.4 U3.15 U3.16 U3.31 U3.47 U4.1 U5.4 U6.1 U7.2 U8.2 X1.2 Y1.2 Y1.4 | length 3606.9
  Top Layer w8: v1(1474.31,779.49) 1474.31,773.93 C31.2@1495.46,752.78 ; U1.21@1964.37,1430.83 1964.37,1409.65 1960.62,1405.91 1960.62,1404.03 1960.38,1403.79 1960.38,1335.94 1972.84,1323.48 2028.16,1323.48 C5.1@2051,1346.32 ; C7.2@2438,1259.41 C7.2@2444,1265.41
  Top Layer w10: D2.2@569.06,1566 569.06,1597.47 570.06,1598.47 v1(570.06,1602.44) ; v1(670.64,1204.99) 690.63,1185 727,1185 752.71,1159.29 U3.4@802.13,1159.29 ; C21.2@694.59,1443 696.59,1445 v1(732,1445) ; U7.2@696.11,1536.17 738.68,1536.17 747.46,1544.95 C45.2@747.46,1638.21 v1(783.31,1638.21) ; C30.2@720,1025.31 720.25,1025.57 v1(748.95,1025.57) ; v1(905.63,750.31) C27.2@905.63,780 ; U3.31@1148.58,852.2 1148.58,808.18 1159.69,797.08 C26.2@1159.69,775 v1(1192.94,775) ; v1(1181.12,1198.24) 1181.54,1198.66 U3.47@1239.13,1198.66 1284.05,1198.66 1292.39,1190.31 C24.2@1315,1190.31 ; C13.2@1681.83,1292.1 1661.72,1272 v1(1549.69,1272) 1518.44,1272 1508.15,1282.29 1508.15,1432.13 1522.02,1446 v1(1616.31,1446) 1673.12,1446 v1(1681.83,1437.29) ; v1(1708.9,1292.1) 1757.19,1292.1 1775.83,1310.74 v1(1775.83,1334.37) ; X1.2@2064.94,1298.72 2064.94,1313.94 v1(2090,1339) ; v1(2438,1231) 2444,1237 C7.2@2444,1265.41
  Top Layer w15: S1.4@63.5,1738.58 63.5,1688.5 v1(65,1687.01) ; S2.2@63.5,1861.42 63.5,1923.5 v1(65,1925) ; J5.5@162.5,822.64 v1(217.86,822.64) ; v1(310,1740) 311.42,1738.58 S1.3@376.5,1738.58 ; v1(336.53,815.37) D1.1@336.53,851.53 ; v1(375,1920) 376.5,1918.5 S2.1@376.5,1861.42 ; v1(429,574.69) R34.1@455.32,574.69 ; D5.2@498.06,1907.87 v1(536.32,1907.87) ; J1.3@1023.11,429.12 v1(1094.66,429.12) ; J1.5@1023.11,479.12 v1(1095.41,479.12) ; J1.7@1023.11,529.12 v1(1099.56,529.12) ; J1.9@1023.11,579.12 v1(1100.45,579.12) ; v1(1480,1722) 1482.63,1724.63 C48.2@1482.63,1785.54 1507.11,1785.54 1520.97,1799.4 U8.2@1545.48,1799.4 ; R21.1@1629.6,642.6 1629.6,666.96 v1(1630.05,667.41) ; v1(1673,1689) C20.1@1700.32,1689 1700.31,1706.24 1689.41,1717.15 C10.2@1689.41,1738 ; C13.2@1681.83,1292.1 v1(1708.9,1292.1) ; C12.2@1681.83,1410.22 v1(1681.83,1437.29) ; v1(1775.83,1334.37) 1777.63,1336.17 C19.1@1805.83,1336.17 ; v1(1790.97,1717.52) 1792.82,1719.37 C2.1@1821.14,1719.37 1821.14,1747.06 1793.47,1774.72 C1.2@1793.47,1793 ; C3.1@2130.83,1569.05 2174.39,1569.05 v1(2188.47,1554.98) ; C18.1@2130.83,1654.06 2175.94,1654.06 v1(2190,1640) ; v1(2316.67,1800.59) C14.2@2363.8,1800.59 2364.14,1800.25 C15.2@2426.52,1800.25 ; TP3.1@2522,1803 2522,1872 v1(2552,1902) 2524,1930 v1(2524,1931)
  Top Layer w20: v1(1072.45,1476) C23.1@1072.45,1501.93 ; Y1.2@1549.54,1315.69 1549.54,1272.15 v1(1549.69,1272) ; v1(1616.31,1446) 1616.46,1445.85 Y1.4@1616.46,1402.31 ; v1(1631,1010) U2.15@1702.28,1010 ; R12.1@1981.65,370 v1(2010,370) ; v1(2392,394) 2392.28,394.28 U2.38@2392.28,450.98 ; U2.1@2392.28,1120.28 C6.2@2392.28,1207.92
  Top Layer w30: v1(688,409.37) 689.4,410.77 D12.2@689.4,459.37
  other v1: 463,55 939,86 2606,189 1898,233 2407,304 2323,320 1845,370 653,529.37 2162,549 287,571 1855,597 2064,637 2127,637 1890,690 2229,749 1812,794 2228,821 1417.31,844.63 488.42,849.27 670.1,877.3 701.14,878.78 730.96,880.03 763.24,879.53 2223,886 1833,891 1515,930 489.2,934.12 521.27,967.48 411,976 367,986 2190,986 549.68,996.7 470,1029 596,1040 509,1065 632,1075 548,1098 169,1130 591.36,1141.51 226,1148 1414.45,1165.12 169,1168 1393.53,1183.43 2630,1285 1463.83,1287.57 2531,1302 2215.49,1366.85 2390,1384 151,1436 191.91,1457.41 2615,1505 46,1506 188.59,1512.14 242,1512 133,1513 885,1624 589.67,1640.53 818.34,1652.41 858,1654 513,1664 1568.86,1674 1536.86,1674.7 275,1679 162,1684 898,1698 565,1715 1308.97,1729.38 875,1740 1453,1749 785,1757 699,1758 1428,1773 1760.47,1779.49 1728,1779.92 581,1869 718,1871 858,1873 267,1925 168,1927 183,2060
  other v2: 2042.83,771.37 2152.83,771.37 2101.83,773.37 2041.83,824.37 2149.83,824.37 2097,825 2102.83,878.37 2042.83,879.37 2148.83,879.37 1870.83,1491.37 1980.83,1491.37 1929.83,1493.37 1869.83,1544.37 1977.83,1544.37 1925,1545 1930.83,1598.37 1870.83,1599.37 1976.83,1599.37
GPIO_0: J3.1 U1.25 | length 1783.5
  Top Layer w6: U1.25@2039.17,1458.39 2064.92,1458.39 2084.3,1439 2374,1439 v1(2429,1384)
  Bottom Layer w6: J3.1@1640,2000 1708.23,1931.77 2163.23,1931.77 2218,1877 2408.44,1877 2479.69,1805.76 2479.69,1678.61 2467.52,1666.44 2467.52,1422.52 v1(2429,1384)
GPIO_1: J3.2 U1.26 | length 1805
  Top Layer w6: U1.26@2039.17,1474.13 2068.97,1474.13 2088.43,1454.67 2401.33,1454.67 v1(2426,1430)
  Bottom Layer w6: J3.2@1540,2000 1622.56,1917.44 2138.56,1917.44 2194,1862 2407.89,1862 2468.69,1801.2 2468.69,1683.16 2456.52,1671 2456.52,1460.52 v1(2426,1430)
GPIO_2: J3.3 U1.27 | length 1847.9
  Top Layer w6: J3.3@1440,2000 J3.3@1446.5,1993.5 ; U1.27@2039.17,1489.88 2039.69,1489.37 2073.53,1489.37 2093.9,1469 v1(2427,1469)
  Bottom Layer w6: J3.3@1440,2000 1536.56,1903.44 2121.56,1903.44 2177,1848 2406.33,1848 2457.69,1796.65 2457.69,1691.71 2427,1661.02 v1(2427,1469)
GPIO_3: R9.2 U1.28 | length 179.3
  Top Layer w6: U1.28@2039.17,1505.63 2077.07,1505.63 2092.33,1490.37 R9.2@2212.14,1490.37
GPIO_4: R15.2 U1.29 | length 191.6
  Top Layer w6: U1.29@2039.17,1521.38 2091.82,1521.38 2107.83,1505.37 2167.38,1505.37 2196.38,1534.37 R15.2@2212.14,1534.37
GPIO_5: R16.2 U1.31 | length 198.2
  Top Layer w6: U1.31@2039.17,1552.87 2078.07,1552.87 2116.57,1591.37 2203.08,1591.37 R16.2@2216.08,1578.37
GPIO_9: J4.2 SJ1.1 U1.33 | length 2154.9
  Top Layer w6: U1.33@2039.17,1584.37 2069.37,1584.37 2106.05,1621.05 2106.05,1670.45 2111.71,1676.12 2203.88,1676.12 2224.22,1655.78 SJ1.1@2262.84,1655.78 2312.22,1655.78 v1(2323,1645)
  Bottom Layer w6: J4.2@2100,100 2100,221 2040,281 2040,384 1936,488 1936,959.33 2311.51,1334.84 2311.51,1456.51 2344.78,1489.78 2344.78,1623.22 v1(2323,1645)
GPIO_10: J4.3 SJ2.1 U1.34 | length 2340.5
  Top Layer w6: U1.34@2039.17,1600.12 2065.32,1600.12 2092.05,1626.85 2092.05,1676.25 2106.17,1690.37 2183.37,1690.37 2194.41,1701.41 v1(2194.41,1734) SJ2.1@2194.41,1774.99
  Bottom Layer w6: v1(2194.41,1734) 2317.7,1734 2373.08,1678.62 2373.08,1463.08 2337,1427 2337,1327.8 1972,962.8 1972,502 2074,400 2074,302 2200,176 J4.3@2200,100
GPIO_11: J4.4 U1.35 | length 2451.4
  Top Layer w6: U1.35@2039.17,1615.87 2060.96,1615.87 2078.05,1632.96 2078.05,1682.05 2108,1712 v1(2162,1712) ; J4.4@2290,100 J4.4@2300,100
  Bottom Layer w6: v1(2162,1712) 2199.28,1712 2206.28,1719 2311,1719 2358.78,1671.22 2358.78,1473.78 2323,1438 2323,1330.77 1957,964.77 1957,492 2057,392 2057,289 2151,195 2151,68 2173,46 2246,46 J4.4@2300,100
GPIO_12: J3.9 J4.5 R7.1 U1.36 | length 3835
  Top Layer w6: J3.9@840,2000 901,1939 1741.15,1939 v1(1811.77,1868.38) ; U1.36@2039.17,1631.61 2056.91,1631.61 2064.05,1638.76 2064.05,1691.43 2095.51,1722.89 R7.1@2095.51,1738.31 2115.8,1738.31 v1@2119.74,1734.37
  Bottom Layer w6: v1(1811.77,1868.38) 1985.73,1868.38 v1(2119.88,1734.23) 2138.65,1753 2318.5,1753 2387.08,1684.42 2387.08,1452.08 2351,1416 2351,1322 1986,957 1986,512 2092,406 2092,317 2215,194 2306,194 J4.5@2400,100
GPIO_13: J3.10 J4.6 R8.1 U1.37 | length 4245.8
  Top Layer w6: J3.10@740,2000 819,1921 1708,1921 v1(1748,1881) ; U1.37@2011.61,1659.17 2011.61,1674.61 2049.01,1712.01 2049.01,1734.37 2027,1756.38 2027,1791 2073,1837 v1(2120,1837)
  Bottom Layer w6: v1(1748,1881) 1755.66,1888.66 2068.34,1888.66 v1(2120,1837) 2401.77,1837 2446.69,1792.09 2446.69,1696.27 2408,1657.58 2408,1453 2365,1410 2365,1315 2004,954 2004,520 2112,412 2112,322 2217,217 2383,217 J4.6@2500,100
GPIO_16: J2.1 R11.2 U1.38 | length 2099.8
  Top Layer w6: R11.2@1345.75,1060 1377.29,1060 1386.22,1051.06 v1(1386.22,1026.36) ; U1.38@1995.87,1659.17 1995.87,1692.87 v1(2018,1715) 2018,1737 2011,1744 2011,1802 2084,1875 2375,1875 J2.1@2500,2000
  Bottom Layer w6: v1(1386.22,1026.36) 1433.26,1026.36 1461.9,1055 1814.1,1055 2045.75,1286.65 2045.75,1403.07 2158.47,1515.79 2158.47,1579.19 2116.22,1621.44 2108.56,1621.44 2018,1712 v1(2018,1715)
GPIO_17: J2.2 U1.39 U3.39 | length 2158.8
  Top Layer w6: U3.39@1239.13,1041.18 1299.03,1041.18 1336.34,1003.88 1401.67,1003.88 1414.05,1016.26 v1(1414.05,1051.25) ; U1.39@1980.12,1659.17 1980.12,1702.12 1990,1712 v1(1990,1735) 1990,1813 2075,1898 2298,1898 J2.2@2400,2000
  Bottom Layer w6: v1@1414.05,1051 1433.05,1070 1809.3,1070 2034.75,1295.45 2034.75,1407.62 2147.47,1520.34 2147.47,1574.63 2114.03,1608.06 2097.84,1608.06 1990,1715.91 v1(1990,1735)
GPIO_18: J2.3 U1.40 | length 568.3
  Top Layer w6: U1.40@1964.37,1659.17 1964.37,1815.37 2070,1921 2221,1921 J2.3@2300,2000